# EAGLE board Proiect TSC v74 (EAGLE 9.7.0)
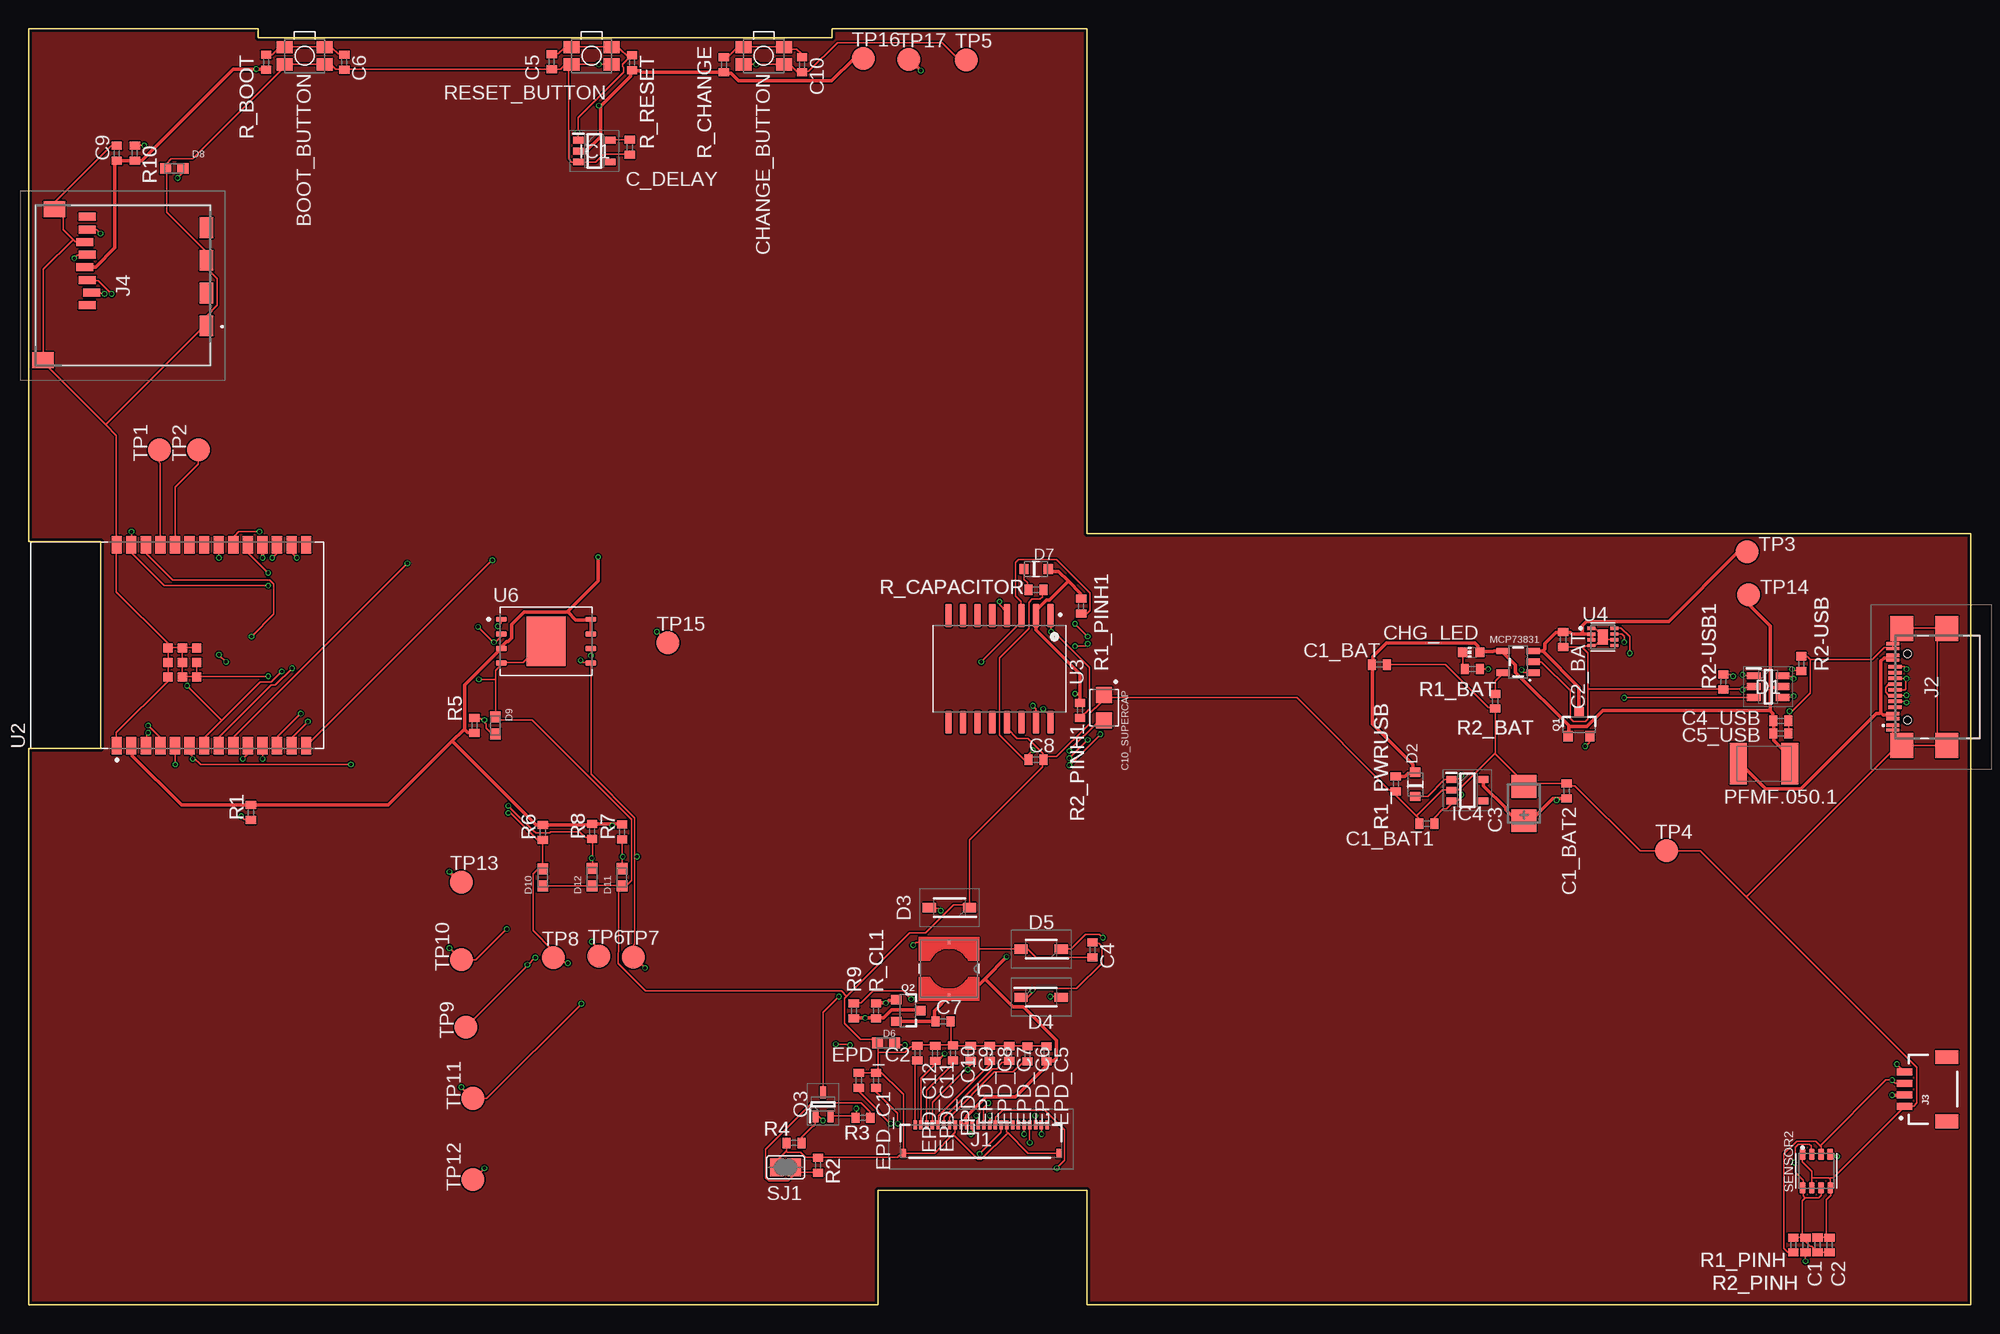
[diagram p0: board, top side]
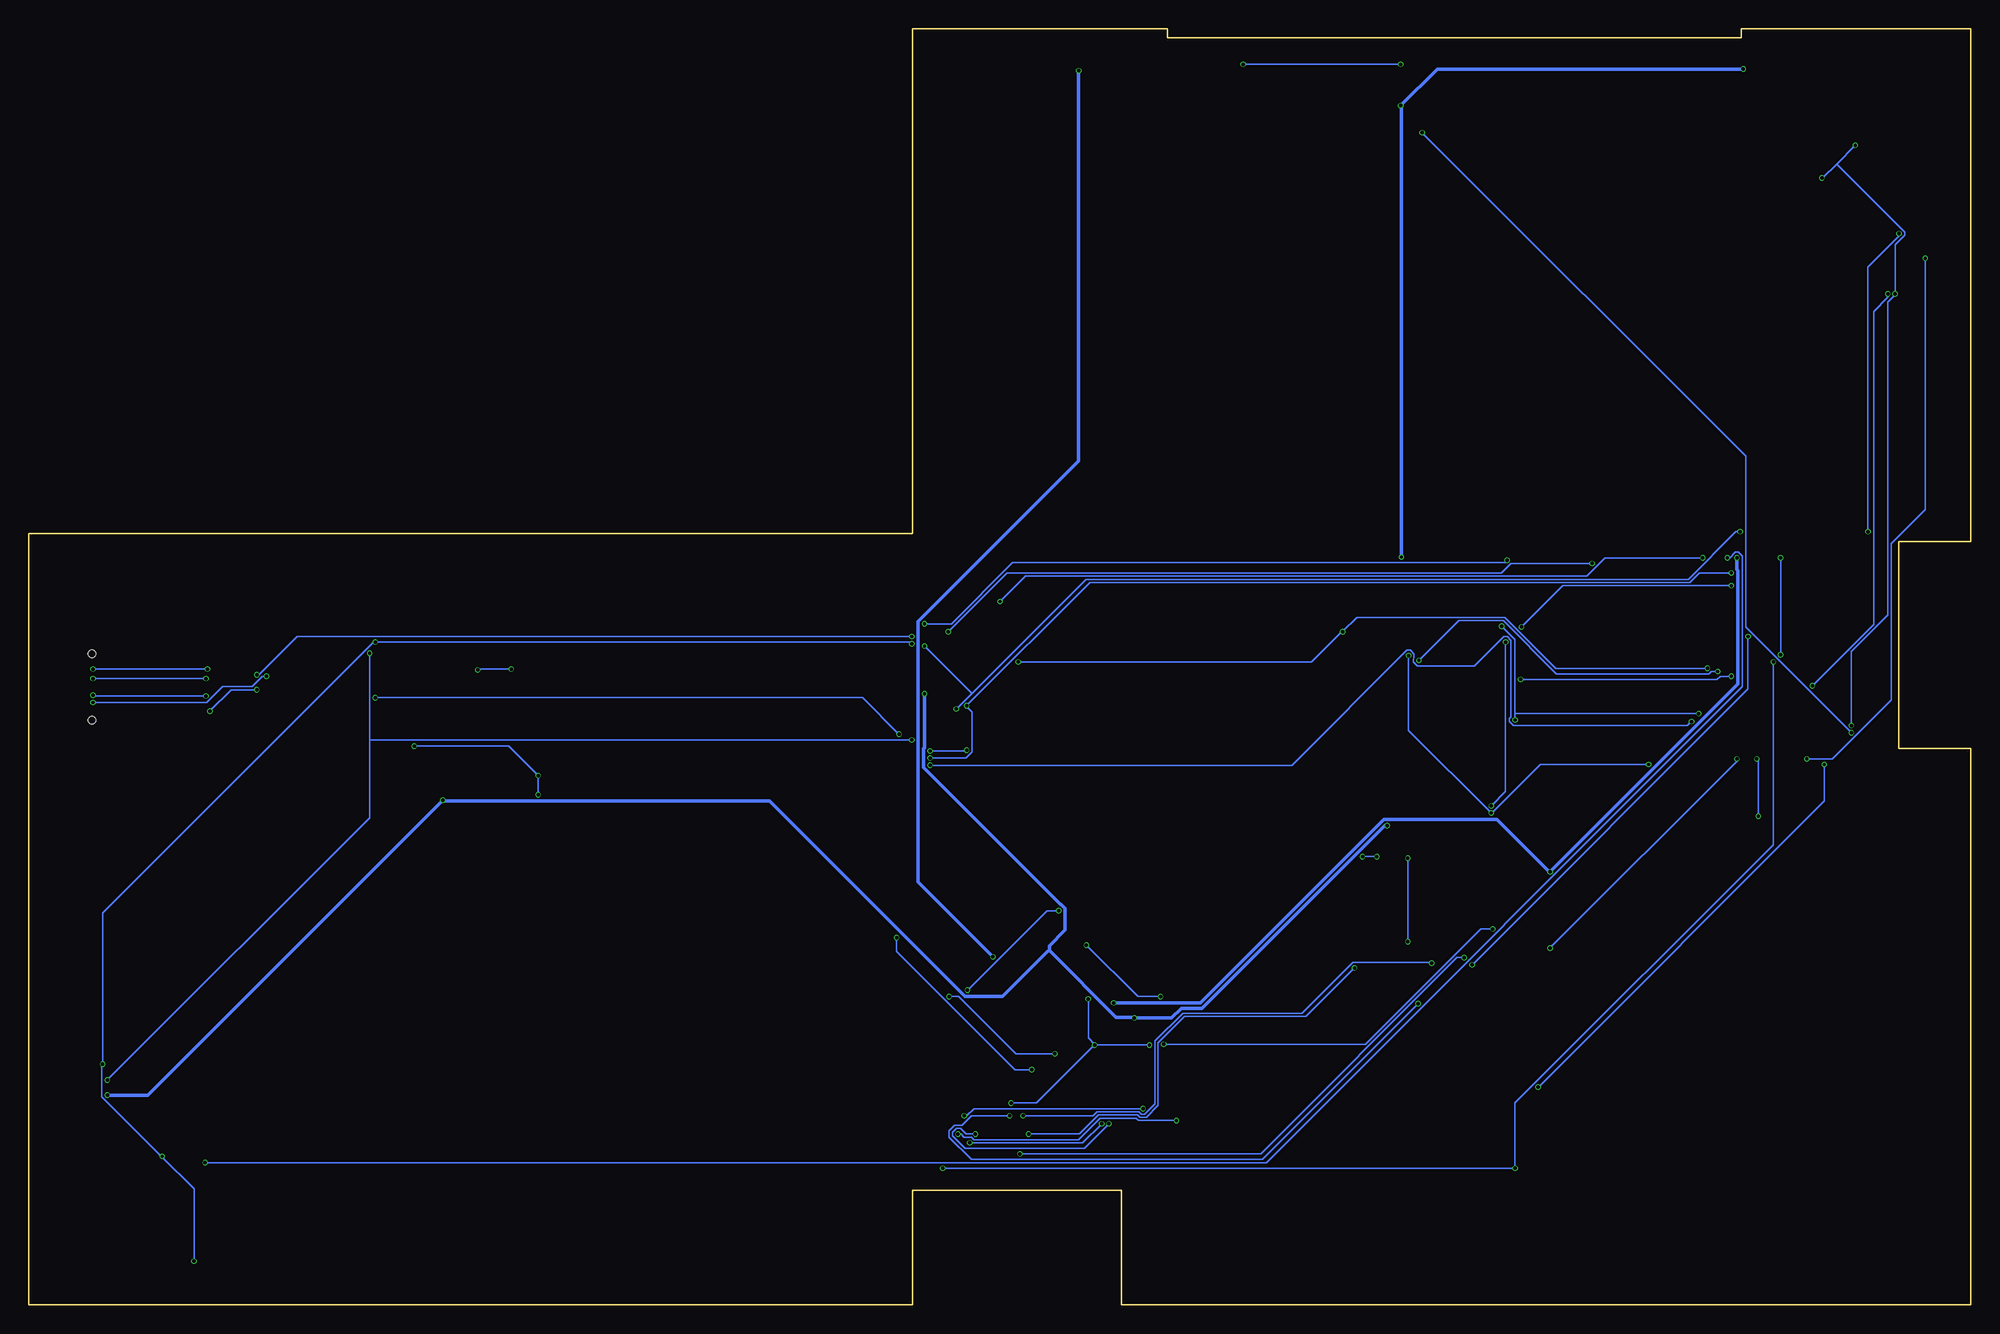
[diagram p1: board, bottom side, seen from below]

Size 169.2 x 111.2 mm. Coordinates in mm from the lower left corner, seen from the top.
Outline: 70,111.2 92.2,111.2 92.2,67.2 169.2,67.2 169.2,0 169.19,0 92.2,0 92.2,10 74,10 74,0 0,0 0,48.49 6.25,48.49 6.25,66.49 0,66.49 0,111.2 20,111.2 20,110.4 70,110.4 70,111.2
Copper layers (1*16): Top 0.035mm / dielectric 1.6mm / Bottom 0.035mm
Design rules "jlcpcb-2layers.dru": minimum track width 5mil, minimum drill 0.3mm, track to track 5mil, track to pad 5mil, pad to pad 5mil, via to via 5mil, smd to smd 5mil, copper to edge 0.2mm, drill to drill 6mil, minimum pad ring 10mil, minimum via ring 3mil, stop-mask expansion 4mil, vias tented up to drill 0mil, thermal gap 10mil
Net classes: 0 default: width 0.15 mm; 1 power: width 0.3 mm

## Footprints (pad centres in the part's own frame; a part is rotated, then mirrored left to right if it is on the bottom)
MYBUTTON = smd 1.4 x 1.05: 1 1.75,0.75; 2 -1.75,0.75; 3 -1.75,-0.75; 4 1.75,-0.75
ESP32_WROVER_EAGLE-LTSPICE_C0402 = smd 0.7 x 0.9: 1 -0.65,0; 2 0.65,0
RCL_CT3528 = smd 2 x 2.2: + -1.5,0; - 1.5,0
EAGLE-LTSPICE_C0402 = smd 0.7 x 0.9: 1 -0.65,0; 2 0.65,0
CAPCP3225X100N = smd 1.4 x 1.4: 1 -1.1,0; 2 1.1,0
ADAFRUIT_CHIP-LED0603 = smd 0.8 x 0.8: A 0,-0.75; C 0,0.75
SOT95P280X145-6N = smd 1.2 x 0.6: 1 -1.25,0.95; 2 -1.25,0; 3 -1.25,-0.95; 4 1.25,-0.95; 5 1.25,0; 6 1.25,0.95
ESP32_WROVER_AVX---SD0805S020S1R0_AVX_SD0805S020S1R0_0 = smd 0.8 x 0.9: 1 -1.05,0; 2 1.05,0
SOD3716X135N = smd 1.15 x 0.8: 1 -1.75,0; 2 1.75,0
DIOC1608X36N = smd 0.97 x 0.94: 1 -0.75,0; 2 0.75,0
SOT95P280X125-5N = smd 0.9 x 0.6: 1 -1.4,0.95; 2 -1.4,0; 3 -1.4,-0.95; 4 1.4,-0.95; 5 1.4,0.95
SOT95P280X120-5N = smd 0.9 x 0.6: 1 -1.4,0.95; 2 -1.4,0; 3 -1.4,-0.95; 4 1.4,-0.95; 5 1.4,0.95
FH34SRJ24S05SH99 = smd 0.3 x 0.8: 1 5.75,1.45; 2 5.25,1.45; 3 4.75,1.45; 4 4.25,1.45; 5 3.75,1.45; 6 3.25,1.45; 7 2.75,1.45; 8 2.25,1.45; 9 1.75,1.45; 10 1.25,1.45; 11 0.75,1.45; 12 0.25,1.45; 13 -0.25,1.45; 14 -0.75,1.45; 15 -1.25,1.45; 16 -1.75,1.45; 17 -2.25,1.45; 18 -2.75,1.45; 19 -3.25,1.45; 20 -3.75,1.45; 21 -4.25,1.45; 22 -4.75,1.45; 23 -5.25,1.45; 24 -5.75,1.45 | smd 0.4 x 0.8: MP1 6.75,-1.05; MP2 -6.75,-1.05
SAMACSYS_PARTS_USB4110GFA = smd 0.3 x 1.15: A1 -3.75,3.878; A4 -2.75,3.878; A5 -1.25,3.678; A6 -0.25,3.678; A7 0.25,3.678; A8 1.25,3.678; A9 2.75,3.878; A12 3.75,3.878; B1 3.35,3.878; B4 2.35,3.878; B5 1.75,3.678; B6 0.75,3.678; B7 -0.75,3.678; B8 -1.75,3.678; B9 -2.35,3.878; B12 -3.35,3.878 | smd 2.18 x 2: MP1 -5.11,-0.827; MP2 5.11,-0.827; MP3 -5.11,3.103; MP4 5.11,3.103 | hole 0.65: -2.89,2.603; 2.89,2.603
JST04_1MM_RA = smd 0.6 x 1.35: 1 -1.5,0; 2 -0.5,0; 3 0.5,0; 4 1.5,0 | smd 1.2 x 2: NC1 2.8,-3.675; NC2 -2.8,-3.675
112ATAARR03ATTEND = smd 1.8 x 1.2: G1 10.6,10.4; G2 4.9,10.4; S1 7.75,10.4; S2 2.05,10.4 | smd 1.4 x 1.9: G3 13.6,-3.85; G4 0.45,-2.85 | smd 0.7 x 1.5: P1 8.8,0; P2 7.7,0.4; P3 6.6,0; P4 5.5,-0.2; P5 4.4,0; P6 3.3,-0.2; P7 2.2,0; P8 1.1,0
IND_4828-WE-TPC_WRE = smd 0.3 x 0.3: 1 -2.286,0; 2 2.286,0
ESP32_WROVER_SPARKFUN-IC-POWER_SOT23-5 = smd 0.55 x 1.2: 1 -0.95,-1.3; 2 0,-1.3; 3 0.95,-1.3; 4 0.95,1.3; 5 -0.95,1.3
ESP32C6_VARISTOR_CT/CN1812 = smd 1.5 x 3.6: 1 -2.25,0; 2 2.25,0
ESP32_WROVER_SPARKFUN-DISCRETESEMI_SOT23-3 = smd 0.8 x 0.9: 1 -0.95,-1; 2 0.95,-1; 3 0,1.1
SOT65P210X110-3N = smd 1.05 x 0.5: 1 -1.05,0.65; 2 -1.05,-0.65; 3 1.05,0
ESP32_WROVER_EAGLE-LTSPICE_R0402 = smd 0.7 x 0.9: 1 -0.65,0; 2 0.65,0
ESP32_WROVER_BME680_PSON80P300X300X100-8N = smd 1.016 x 0.5: 1 1.458,1.2; 2 1.458,0.4; 3 1.458,-0.4; 4 1.458,-1.2; 5 -1.458,-1.22; 6 -1.458,-0.4; 7 -1.458,0.4; 8 -1.458,1.2
SJ = smd 1.168 x 1.6: 1 -0.762,0; 2 0.762,0
TP20R = smd 2 x 2: TP 0,0
XCVR_ESP32-C6-WROOM-1-N8 = smd 1.5 x 0.9: 1 -8.75,5.26; 2 -8.75,3.99; 3 -8.75,2.72; 4 -8.75,1.45; 5 -8.75,0.18; 6 -8.75,-1.09; 7 -8.75,-2.36; 8 -8.75,-3.63; 9 -8.75,-4.9; 10 -8.75,-6.17; 11 -8.75,-7.44; 12 -8.75,-8.71; 13 -8.75,-9.98; 14 -8.75,-11.25; 15 8.75,-11.25; 16 8.75,-9.98; 17 8.75,-8.71; 18 8.75,-7.44; 19 8.75,-6.17; 20 8.75,-4.9; 21 8.75,-3.63; 22 8.75,-2.36; 23 8.75,-1.09; 24 8.75,0.18; 25 8.75,1.45; 26 8.75,2.72; 27 8.75,3.99; 28 8.75,5.26 | smd 0.8 x 0.8: 29_1 -2.755,0.79; 29_2 -1.505,0.79; 29_3 -0.255,0.79; 29_4 -2.755,-0.46; 29_5 -1.505,-0.46; 29_6 -0.255,-0.46; 29_7 -2.755,-1.71; 29_8 -1.505,-1.71; 29_9 -0.255,-1.71
SOIC127P1032X265-16N = smd 2.05 x 0.59: 1 -4.655,4.445; 2 -4.655,3.175; 3 -4.655,1.905; 4 -4.655,0.635; 5 -4.655,-0.635; 6 -4.655,-1.905; 7 -4.655,-3.175; 8 -4.655,-4.445; 9 4.655,-4.445; 10 4.655,-3.175; 11 4.655,-1.905; 12 4.655,-0.635; 13 4.655,0.635; 14 4.655,1.905; 15 4.655,3.175; 16 4.655,4.445
SON50P200X200X80-9N = smd 0.76 x 0.27: 1 -0.985,0.75; 4 -0.985,-0.75; 5 0.985,-0.75; 6 0.985,-0.25; 7 0.985,0.25; 8 0.985,0.75 | smd 0.76 x 0.3: 2 -0.985,0.25; 3 -0.985,-0.25 | smd 0.9 x 1.3: 9 0,0
SON127P600X800X80-9N = smd 0.94 x 0.44: 1 -3.895,1.905; 2 -3.895,0.635; 3 -3.895,-0.635; 4 -3.895,-1.905; 5 3.895,-1.905; 6 3.895,-0.635; 7 3.895,0.635; 8 3.895,1.905 | smd 3.4 x 4.3: 9 0,0

## Placement (x,y rotation side)
BOOT_BUTTON  BUTTON_CUSYOMV1  [MYBUTTON]  24.04,108.83 180 top
C1  100nF  [ESP32_WROVER_EAGLE-LTSPICE_C0402]  155.84,5.22 90 top
C1_BAT  4.7uF  [ESP32_WROVER_EAGLE-LTSPICE_C0402]  117.68,55.79 0 top
C1_BAT1  4.7uF  [ESP32_WROVER_EAGLE-LTSPICE_C0402]  121.8,41.93 180 top
C1_BAT2  4.7uF  [ESP32_WROVER_EAGLE-LTSPICE_C0402]  133.99,44.77 90 top
C2  100nF  [ESP32_WROVER_EAGLE-LTSPICE_C0402]  156.89,5.22 90 top
C2_BAT  4.7uF  [ESP32_WROVER_EAGLE-LTSPICE_C0402]  133.68,57.98 270 top
C3  100uF TANT  [RCL_CT3528]  130.26,43.69 90 top
C4  4.7uF/25V  [ESP32_WROVER_EAGLE-LTSPICE_C0402]  92.67,30.92 270 top
C4_USB  100nF  [ESP32_WROVER_EAGLE-LTSPICE_C0402]  152.64,50.89 0 top
C5  1uF  [EAGLE-LTSPICE_C0402]  45.57,108.32 270 top
C5_USB  100nF  [ESP32_WROVER_EAGLE-LTSPICE_C0402]  152.65,49.79 0 top
C6  100nF  [EAGLE-LTSPICE_C0402]  27.49,108.29 270 top
C7  10uF  [EAGLE-LTSPICE_C0402]  79.67,24.7 0 top
C8  100nF  [EAGLE-LTSPICE_C0402]  87.77,47.5 0 top
C9  100nF  [ESP32_WROVER_EAGLE-LTSPICE_C0402]  7.67,100.34 90 top
C10  100nF  [EAGLE-LTSPICE_C0402]  67.37,108.05 270 top
C10_SUPERCAP  CPH3225A  [CAPCP3225X100N]  93.69,52.04 270 top
C_DELAY  100nF  [EAGLE-LTSPICE_C0402]  52.37,100.86 270 top
CHANGE_BUTTON  BUTTON_CUSYOMV1  [MYBUTTON]  64.04,108.83 180 top
CHG_LED  [ADAFRUIT_CHIP-LED0603]  125.68,56.87 90 top
D1  USBLC6-2SC6Y  [SOT95P280X145-6N]  151.54,53.87 0 top
D2  ESP32_WROVER_AVX---SD0805S020S1R0_AVX_SD0805S020S1R0_0_0AVX_SD0805S020S1R0_0_0  [ESP32_WROVER_AVX---SD0805S020S1R0_AVX_SD0805S020S1R0_0]  120.8,45.36 90 top
D3  MBR0530  [SOD3716X135N]  80.21,34.62 180 top
D4  MBR0530  [SOD3716X135N]  88.21,26.81 0 top
D5  MBR0530  [SOD3716X135N]  88.21,31 180 top
D6  PGB1010603MR  [DIOC1608X36N]  74.69,22.83 0 top
D7  ESP32_WROVER_AVX---SD0805S020S1R0_AVX_SD0805S020S1R0_0_0AVX_SD0805S020S1R0_0_0  [ESP32_WROVER_AVX---SD0805S020S1R0_AVX_SD0805S020S1R0_0]  87.77,64.12 0 top
D8  PGB1010603MR  [DIOC1608X36N]  12.69,99.02 0 top
D9  PGB1010603MR  [DIOC1608X36N]  40.65,50.49 270 top
D10  PGB1010603MR  [DIOC1608X36N]  44.79,37.25 90 top
D11  PGB1010603MR  [DIOC1608X36N]  51.69,37.26 90 top
D12  PGB1010603MR  [DIOC1608X36N]  49.09,37.27 90 top
EPD_C1  1uF/50V  [ESP32_WROVER_EAGLE-LTSPICE_C0402]  73.82,19.56 270 top
EPD_C2  1uF/50V  [ESP32_WROVER_EAGLE-LTSPICE_C0402]  72.32,19.57 270 top
EPD_C5  1uF/50V  [ESP32_WROVER_EAGLE-LTSPICE_C0402]  88.67,21.88 270 top
EPD_C6  1uF/50V  [ESP32_WROVER_EAGLE-LTSPICE_C0402]  87.02,21.89 270 top
EPD_C7  1uF/50V  [ESP32_WROVER_EAGLE-LTSPICE_C0402]  85.42,21.9 270 top
EPD_C8  1uF/50V  [ESP32_WROVER_EAGLE-LTSPICE_C0402]  83.73,21.91 270 top
EPD_C9  1uF/50V  [ESP32_WROVER_EAGLE-LTSPICE_C0402]  82.08,21.92 270 top
EPD_C10  1uF/50V  [ESP32_WROVER_EAGLE-LTSPICE_C0402]  80.52,21.95 270 top
EPD_C11  1uF/50V  [ESP32_WROVER_EAGLE-LTSPICE_C0402]  78.97,21.93 270 top
EPD_C12  1uF/50V  [ESP32_WROVER_EAGLE-LTSPICE_C0402]  77.42,21.94 270 top
IC1  BD5229G-TR  [SOT95P280X125-5N]  49.28,100.54 0 top
IC4  XC6220A331MR-G  [SOT95P280X120-5N]  125.34,44.85 0 top
J1  FH34SRJ-24S-0.5SH_99_  [FH34SRJ24S05SH99]  82.97,14.25 0 top
J2  SAMACSYS_PARTS_USB4110-GF-A  [SAMACSYS_PARTS_USB4110GFA]  166.28,53.84 90 top
J3  QWIIC_RIGHT_ANGLE  [JST04_1MM_RA]  163.43,18.79 90 top
J4  112A-TAAR-R03_ATTEND  [112ATAARR03ATTEND]  5.09,95.91 270 top
L1  68uH  [IND_4828-WE-TPC_WRE]  80.18,29.29 270 top
MCP73831  ESP32_WROVER_SPARKFUN-IC-POWER_MCP73831  [ESP32_WROVER_SPARKFUN-IC-POWER_SOT23-5]  129.76,56.03 90 top
PFMF.050.1  ESP32C6_VARISTORCN1812  [ESP32C6_VARISTOR_CT/CN1812]  151.19,47.17 0 top
Q1  20V/4.2A/52mΩ/1.4W  [ESP32_WROVER_SPARKFUN-DISCRETESEMI_SOT23-3]  135.07,50.55 0 top
Q2  20V/4.2A/52mΩ/1.4W  [ESP32_WROVER_SPARKFUN-DISCRETESEMI_SOT23-3]  76.59,25.65 270 top
Q3  SI1308EDL-T1-GE3  [SOT65P210X110-3N]  69.21,17.49 90 top
R1  10K  [ESP32_WROVER_EAGLE-LTSPICE_R0402]  19.36,42.9 90 top
R1_BAT  200  [ESP32_WROVER_EAGLE-LTSPICE_R0402]  125.76,55.41 0 top
R1_PINH  10K  [ESP32_WROVER_EAGLE-LTSPICE_R0402]  153.74,5.22 90 top
R1_PINH1  10K  [ESP32_WROVER_EAGLE-LTSPICE_R0402]  91.69,60.88 90 top
R1_PWRUSB  100K  [ESP32_WROVER_EAGLE-LTSPICE_R0402]  119.1,45.4 90 top
R2  2.2  [ESP32_WROVER_EAGLE-LTSPICE_R0402]  68.77,12.18 270 top
R2-USB  5k1  [ESP32_WROVER_EAGLE-LTSPICE_R0402]  154.43,55.87 90 top
R2-USB1  5k1  [ESP32_WROVER_EAGLE-LTSPICE_R0402]  147.63,54.29 90 top
R2_BAT  2K  [ESP32_WROVER_EAGLE-LTSPICE_R0402]  127.76,52.6 90 top
R2_PINH  10K  [ESP32_WROVER_EAGLE-LTSPICE_R0402]  154.79,5.22 90 top
R2_PINH1  10K  [ESP32_WROVER_EAGLE-LTSPICE_R0402]  91.59,51.79 90 top
R3  0.47  [ESP32_WROVER_EAGLE-LTSPICE_R0402]  72.67,16.3 180 top
R4  10k  [ESP32_WROVER_EAGLE-LTSPICE_R0402]  66.67,14.11 0 top
R5  10K  [ESP32_WROVER_EAGLE-LTSPICE_R0402]  38.84,50.49 270 top
R6  10K  [ESP32_WROVER_EAGLE-LTSPICE_R0402]  44.79,41.18 90 top
R7  10K  [ESP32_WROVER_EAGLE-LTSPICE_R0402]  51.69,41.2 90 top
R8  10K  [ESP32_WROVER_EAGLE-LTSPICE_R0402]  49.09,41.24 90 top
R9  10K  [ESP32_WROVER_EAGLE-LTSPICE_R0402]  71.89,25.62 270 top
R10  10K  [ESP32_WROVER_EAGLE-LTSPICE_R0402]  9.25,100.36 270 top
R_BOOT  10K  [ESP32_WROVER_EAGLE-LTSPICE_R0402]  20.69,108.28 270 top
R_CAPACITOR  15  [ESP32_WROVER_EAGLE-LTSPICE_R0402]  87.77,62.31 0 top
R_CHANGE  10K  [ESP32_WROVER_EAGLE-LTSPICE_R0402]  60.57,108.06 270 top
R_CL1  10K  [ESP32_WROVER_EAGLE-LTSPICE_R0402]  73.82,25.63 270 top
R_RESET  10K  [ESP32_WROVER_EAGLE-LTSPICE_R0402]  52.57,108.25 270 top
RESET_BUTTON  BUTTON_CUSYOMV1  [MYBUTTON]  49.04,108.83 180 top
SENSOR2  ESP32_WROVER_BME680_BME680  [ESP32_WROVER_BME680_PSON80P300X300X100-8N]  155.74,11.67 90 top
SJ1  [SJ]  65.94,11.99 0 top
TP1  TPTP20R  [TP20R]  11.4,74.49 90 top
TP2  TPTP20R  [TP20R]  14.78,74.49 90 top
TP3  TPTP20R  [TP20R]  149.69,65.64 0 top
TP4  TPTP20R  [TP20R]  142.69,39.56 0 top
TP5  TPTP20R  [TP20R]  81.69,108.48 0 top
TP6  TPTP20R  [TP20R]  49.69,30.4 0 top
TP7  TPTP20R  [TP20R]  52.69,30.32 0 top
TP8  TPTP20R  [TP20R]  45.69,30.24 0 top
TP9  TPTP20R  [TP20R]  38.09,24.21 90 top
TP10  TPTP20R  [TP20R]  37.69,30.08 90 top
TP11  TPTP20R  [TP20R]  38.69,18 90 top
TP12  TPTP20R  [TP20R]  38.69,10.92 90 top
TP13  TPTP20R  [TP20R]  37.69,36.84 0 top
TP14  TPTP20R  [TP20R]  149.82,61.89 0 top
TP15  TPTP20R  [TP20R]  55.69,57.68 0 top
TP16  TPTP20R  [TP20R]  72.69,108.6 0 top
TP17  TPTP20R  [TP20R]  76.69,108.52 0 top
U2  ESP32-C6-WROOM-1-N8  [XCVR_ESP32-C6-WROOM-1-N8]  12.93,57.48 90 top
U3  DS3231SN#  [SOIC127P1032X265-16N]  84.58,55.43 270 top
U4  MAX17048G+T10  [SON50P200X200X80-9N]  137.14,58.2 0 top
U6  W25Q512JVEIQ  [SON127P600X800X80-9N]  45.07,57.83 0 top

## Library data of the parts
BOOT_BUTTON CHANGE_BUTTON CHG_LED PFMF.050.1 RESET_BUTTON SJ1 TP1-TP17 = DeskAssistant v19 v1
C1 C1_BAT C1_BAT1 C1_BAT2 C2 C2_BAT C4 C4_USB C5 C5_USB C6-C10 C_DELAY EPD_C1 EPD_C2 EPD_C5-EPD_C12 = DeskAssistant v19 v1; SPICEMODEL: NONE; SPICEPREFIX: C
C3 = DeskAssistant v19 v1; SPICEPREFIX: C
C10_SUPERCAP = DeskAssistant v19 v1; AVAILABILITY: Not in stock; CHECK_PRICES: https://www.snapeda.com/parts/CPH3225A/Seiko+Instruments/view-part/?ref=eda; DESCRIPTION: 11 mF (EDLC) Supercapacitor 3.3 V 1210 (3225 Metric) - -; MF: Seiko Instruments; MP: CPH3225A; PACKAGE: 1210 Seiko; PRICE: None; PURCHASE-URL: https://www.snapeda.com/api/url_track_click_mouser/?unipart_id=562593&manufacturer=Seiko Instruments&part_name=CPH3225A&search_term=None; SNAPEDA_LINK: https://www.snapeda.com/parts/CPH3225A/Seiko+Instruments/view-part/?ref=snap
D1 = DeskAssistant v19 v1; AVAILABILITY: In Stock; CHECK_PRICES: https://www.snapeda.com/parts/USBLC6-2SC6Y/STMicroelectronics/view-part/?ref=eda; DESCRIPTION: 17V Clamp 5A (8/20µs) Ipp Tvs Diode Surface Mount SOT-23-6; MF: STMicroelectronics; MP: USBLC6-2SC6Y; PACKAGE: SOT-23-6 STMicroelectronics; PRICE: None; SNAPEDA_LINK: https://www.snapeda.com/parts/USBLC6-2SC6Y/STMicroelectronics/view-part/?ref=snap
D2 D7 = DeskAssistant v19 v1; CENTROID_NOT_SPECIFIED: No; DATASHEET: http://datasheets.avx.com/schottky.pdf; DIGIKEY_DESCRIPTION: DIODE SCHOTTKY 20V 1A 0805; DIGIKEY_PART_NUMBER: 478-7800-1-ND; LEAD_FREE: yes; MF: AVX; MOUSER_PART_NUMBER: 581-SD0805S020S1R0; PACKAGE: 0805 (2012 metric); PREFIX: D; ROHS: yes; TEMPERATURE_RANGE_HIGH: +125°C; TEMPERATURE_RANGE_LOW: -55°C
D3-D5 = DeskAssistant v19 v1; AVAILABILITY: In Stock; CHECK_PRICES: https://www.snapeda.com/parts/MBR0530/Onsemi/view-part/?ref=eda; DESCRIPTION: Diode Schottky 30 V 500mA Surface Mount SOD-123; MF: ON Semiconductor; MP: MBR0530; PACKAGE: SOD-123-2 ON Semiconductor; PRICE: None; PURCHASE-URL: https://www.snapeda.com/api/url_track_click_mouser/?unipart_id=179458&manufacturer=ON Semiconductor&part_name=MBR0530&search_term=None; SNAPEDA_LINK: https://www.snapeda.com/parts/MBR0530/Onsemi/view-part/?ref=snap
D6 D8-D12 = DeskAssistant v19 v1; AVAILABILITY: In Stock; CHECK_PRICES: https://www.snapeda.com/parts/PGB1010603MR/Littelfuse/view-part/?ref=eda; DESCRIPTION: 150V (Typ) Clamp - Ipp Tvs Diode Surface Mount 0603 (1608 Metric); MF: Littelfuse Inc.; MP: PGB1010603MR; PACKAGE: 0603 Littelfuse Inc.; PRICE: None; PURCHASE-URL: https://www.snapeda.com/api/url_track_click_mouser/?unipart_id=5659453&manufacturer=Littelfuse Inc.&part_name=PGB1010603MR&search_term=None; SNAPEDA_LINK: https://www.snapeda.com/parts/PGB1010603MR/Littelfuse/view-part/?ref=snap
IC1 = DeskAssistant v19 v1; DESCRIPTION: Voltage Detector with Adjustable Delay Time: CMOS processes are utilized to develop high precision, low current consumption CMOS reset ICs that allow arbitrary setting of the delay time. The extensive lineup includes both Nch Open Drain and CMOS output types in a wide range of detection voltages (from 2.3V to 6.0V, in 0.1V steps), enabling selection of the ideal solution based on customer requirements. In addition, the entire series is of course both lead-free and RoHS-compliant.; HEIGHT: 1.25mm; MANUFACTURER_NAME: ROHM Semiconductor; MANUFACTURER_PART_NUMBER: BD5229G-TR; MOUSER_PART_NUMBER: 755-BD5229G-TR; MOUSER_PRICE-STOCK: https://www.mouser.co.uk/ProductDetail/ROHM-Semiconductor/BD5229G-TR?qs=4kLU8WoGk0vvnhrrYwdszw%3D%3D
IC4 = DeskAssistant v19 v1; DESCRIPTION: LDO Voltage Regulators; HEIGHT: 1.2mm; MANUFACTURER_NAME: Torex; MANUFACTURER_PART_NUMBER: XC6220A331MR-G; MOUSER_PART_NUMBER: 865-XC6220A331MR-G; MOUSER_PRICE-STOCK: https://www.mouser.co.uk/ProductDetail/Torex-Semiconductor/XC6220A331MR-G?qs=AsjdqWjXhJ8ZSWznL1J0gg%3D%3D
J1 = DeskAssistant v19 v1; DESCRIPTION: 24 Position FFC, FPC Connector Contacts, Top and Bottom 0.020" (0.50mm) Surface Mount, Right Angle; HEIGHT: 1.1mm; MANUFACTURER_NAME: Hirose; MANUFACTURER_PART_NUMBER: FH34SRJ-24S-0.5SH(99); MOUSER_PART_NUMBER: 798-FH34SRJ24S05SH99; MOUSER_PRICE-STOCK: https://www.mouser.co.uk/ProductDetail/Hirose-Connector/FH34SRJ-24S-0.5SH99?qs=vcbW%252B4%252BSTIpKBl5ap9J8Fw%3D%3D
J2 = DeskAssistant v19 v1; DESCRIPTION: CONN USB 2.0 TYPE-C R/A SMT; HEIGHT: 3.26mm; MANUFACTURER_NAME: GCT (GLOBAL CONNECTOR TECHNOLOGY); MANUFACTURER_PART_NUMBER: USB4110-GF-A; MOUSER_PART_NUMBER: 640-USB4110-GF-A; MOUSER_PRICE-STOCK: https://www.mouser.co.uk/ProductDetail/GCT/USB4110-GF-A?qs=KUoIvG%2F9IlYiZvIXQjyJeA%3D%3D
J3 = DeskAssistant v19 v1; PROD_ID: CONN-13694
J4 = DeskAssistant v19 v1; DESCRIPTION: Micro SD Card Socket, Push-Push Type, Top Mount, SMT, H=1.83mm, 10u; HEIGHT: 1.9mm; MANUFACTURER_NAME: ATTEND; MANUFACTURER_PART_NUMBER: 112A-TAAR-R03 ATTEND
L1 = DeskAssistant v19 v1; COPYRIGHT: Copyright (C) 2024 Ultra Librarian. All rights reserved.; MANUFACTURER_PART_NUMBER: 744043680; MFR_NAME: Wurth Electronics
MCP73831 = DeskAssistant v19 v1; PROD_ID: IC-09995
Q1 Q2 = DeskAssistant v19 v1; PROD_ID: TRAN-14388
Q3 = DeskAssistant v19 v1; AVAILABILITY: In Stock; CHECK_PRICES: https://www.snapeda.com/parts/SI1308EDL-T1-GE3/Vishay+Siliconix/view-part/?ref=eda; DESCRIPTION: Si1308EDL-T1-GE3 N-channel MOSFET Transistor, 1.5 A, 30 V, 3-Pin SC-70 | Siliconix / Vishay SI1308EDL-T1-GE3; MF: Vishay Siliconix; MP: SI1308EDL-T1-GE3; PACKAGE: SOT-323 Vishay Semiconductor; PRICE: None; PURCHASE-URL: https://www.snapeda.com/api/url_track_click_mouser/?unipart_id=274603&manufacturer=Vishay Siliconix&part_name=SI1308EDL-T1-GE3&search_term=None; SNAPEDA_LINK: https://www.snapeda.com/parts/SI1308EDL-T1-GE3/Vishay+Siliconix/view-part/?ref=snap
R1 R1_BAT R1_PINH R1_PINH1 R1_PWRUSB R2 R2-USB R2-USB1 R2_BAT R2_PINH R2_PINH1 R3-R10 R_BOOT R_CAPACITOR R_CHANGE R_CL1 R_RESET = DeskAssistant v19 v1; SPICEMODEL: NONE; SPICEPREFIX: R
SENSOR2 = DeskAssistant v19 v1; AVAILABILITY: Unavailable; DESCRIPTION: Integrated Environmental Unit; MF: Bosch Sensortec; MP: BME680; PACKAGE: LGA-8 Bosch Tools; PRICE: None
U2 = DeskAssistant v19 v1; AVAILABILITY: In Stock; CHECK_PRICES: https://www.snapeda.com/parts/ESP32-C6-WROOM-1-N8/Espressif+Systems/view-part/?ref=eda; DESCRIPTION: Multiprotocol Modules ESP32-C6 module, Wi-Fi 6 in 2.4 GHz band, Bluetooth 5, Zigbee 3.0 and Thread. ESP34-WROOM Compatible - ENGINEERING SAMPLE; MF: Espressif Systems; MP: ESP32-C6-WROOM-1-N8; PACKAGE: None; PRICE: None; SNAPEDA_LINK: https://www.snapeda.com/parts/ESP32-C6-WROOM-1-N8/Espressif+Systems/view-part/?ref=snap
U3 = DeskAssistant v19 v1; AVAILABILITY: In Stock; CHECK_PRICES: https://www.snapeda.com/parts/DS3231SN%23/Analog+Devices/view-part/?ref=eda; DESCRIPTION: Extremely Accurate I²C-Integrated RTC/TCXO/Crystal; MF: Analog Devices; MP: DS3231SN#; PACKAGE: SOIC-16 Maxim; PRICE: None; PURCHASE-URL: https://www.snapeda.com/api/url_track_click_mouser/?unipart_id=99048&manufacturer=Analog Devices&part_name=DS3231SN#&search_term=None; SNAPEDA_LINK: https://www.snapeda.com/parts/DS3231SN%23/Analog+Devices/view-part/?ref=snap
U4 = DeskAssistant v19 v1; AVAILABILITY: In Stock; CHECK_PRICES: https://www.snapeda.com/parts/MAX17048G+T10/Analog+Devices/view-part/?ref=eda; DESCRIPTION: 3µA 1-Cell/2-Cell Fuel Gauge with ModelGauge; MF: Analog Devices; MP: MAX17048G+T10; PACKAGE: TDFN-8 Maxim; PRICE: None; PURCHASE-URL: https://www.snapeda.com/api/url_track_click_mouser/?unipart_id=329239&manufacturer=Analog Devices&part_name=MAX17048G+T10&search_term=None; SNAPEDA_LINK: https://www.snapeda.com/parts/MAX17048G+T10/Analog+Devices/view-part/?ref=snap
U6 = DeskAssistant v19 v1; AVAILABILITY: In Stock; CHECK_PRICES: https://www.snapeda.com/parts/W25Q512JVEIQ/Winbond+Electronics/view-part/?ref=eda; DESCRIPTION: FLASH - NOR Memory IC 512Mb (64M x 8) SPI - Quad I/O 133 MHz 8-WSON (8x6); MF: Winbond Electronics; MP: W25Q512JVEIQ; PACKAGE: Package; PRICE: None; SNAPEDA_LINK: https://www.snapeda.com/parts/W25Q512JVEIQ/Winbond+Electronics/view-part/?ref=snap

## Nets
3V3 [power]: C1_BAT2.1 C3.+ C9.1 D7.2 IC1.2 IC4.5 J3.2 J4.P4 Q2.3 R1.2 R1_PINH1.2 R2_PINH1.2 R5.2 R6.2 R7.2 R8.2 R9.2 R10.2 R_BOOT.2 R_CHANGE.2 R_CL1.2 R_RESET.2 TP16.TP U2.2 U3.2 U6.3 U6.7 U6.8
32KHZ: R2_PINH1.1 U2.9 U3.1
BOOT: BOOT_BUTTON.3 BOOT_BUTTON.4 C6.1 R_BOOT.1
CHANGE: C10.1 CHANGE_BUTTON.3 CHANGE_BUTTON.4 R_CHANGE.1
DN: D1.4 J2.A7 J2.B7
DP: D1.6 J2.A6 J2.B6
EPD_3V3 [power]: C7.1 EPD_C5.2 J1.15 J1.16 L1.2 Q2.2 TP17.TP
EPD_3V3_C [power]: Q2.1 R_CL1.1 TP13.TP U2.18
EPD_BUSY: J1.9 TP9.TP U2.26
EPD_CS: D6.2 J1.12 R9.1 TP10.TP U2.11
EPD_DC: J1.11 TP11.TP U2.5
EPD_RST: J1.10 TP12.TP U2.21
FLASH_CS: D9.2 R5.1 U2.12 U6.1
GDR: J1.2 Q3.1 R4.2
GND: BOOT_BUTTON.1 BOOT_BUTTON.2 C1.2 C1_BAT1.2 C1_BAT2.2 C1_BAT.2 C2.2 C2_BAT.2 C3.- C4_USB.2 C5.2 C5_USB.2 C6.2 C7.2 C8.2 C9.2 C10.2 C10_SUPERCAP.1 C_DELAY.2 CHANGE_BUTTON.1 CHANGE_BUTTON.2 D1.2 D3.1 D6.1 D8.1 D9.1 D10.1 D11.1 D12.1 EPD_C1.1 EPD_C2.1 EPD_C5.1 EPD_C6.1 EPD_C7.1 EPD_C8.1 EPD_C9.1 EPD_C10.1 EPD_C11.1 EPD_C12.1 IC1.3 IC4.2 J1.8 J1.17 J1.MP1 J1.MP2 J2.A1 J2.A12 J2.B1 J2.B12 J2.MP1 J2.MP2 J2.MP3 J2.MP4 J3.1 J4.G1 J4.G2 J4.G3 J4.G4 J4.P6 MCP73831.2 R1_PWRUSB.1 R2-USB1.1 R2-USB.2 R2.1 R2_BAT.1 R4.1 RESET_BUTTON.1 RESET_BUTTON.2 SENSOR2.1 SENSOR2.5 SENSOR2.7 SJ1.1 TP4.TP TP5.TP U2.1 U2.28 U2.29_1 U2.29_2 U2.29_3 U2.29_4 U2.29_5 U2.29_6 U2.29_7 U2.29_8 U2.29_9 U3.13 U4.1 U4.4 U4.6 U4.9 U6.4 U6.9
GPIO8: R1.1 U2.10
I2C_PW: C1.1 C2.1 R1_PINH.2 R2_PINH.2 SENSOR2.2 SENSOR2.6 SENSOR2.8 U2.17
INT_RTC: R1_PINH1.1 TP15.TP U2.8 U3.3
IO/BOOT: U2.15
IO/CHANGE: U2.23
MISO: D12.2 J4.P7 R8.1 TP6.TP U2.27 U6.2
MOSI: D11.2 J1.14 J4.P3 R7.1 TP7.TP U2.7 U6.5
N$1: J2.A5 R2-USB1.2
N$2: J2.B5 R2-USB.1
N$3: C_DELAY.1 IC1.5
N$4: C1_BAT1.1 D2.1 IC4.1 IC4.3 Q1.2
N$5: MCP73831.5 R2_BAT.2
N$6: D7.1 R_CAPACITOR.1
N$7: C4.1 D3.2 D4.1
N$8: EPD_C12.2 J1.24
N$9: MCP73831.1 R1_BAT.2
N$10: CHG_LED.C R1_BAT.1
N$11: C8.1 C10_SUPERCAP.2 R_CAPACITOR.2
N$12: EPD_C10.2 J1.22
N$14: EPD_C8.2 J1.20
N$15: EPD_C7.2 J1.19
N$16: EPD_C6.2 J1.18
N$18: EPD_C2.2 J1.5
N$19: EPD_C1.2 J1.4
PREVGH: D5.1 EPD_C9.2 J1.21
PREVGL: D4.2 EPD_C11.2 J1.23
RESE: J1.3 Q3.2 R3.2
RESE': R2.2 R3.1 SJ1.2
RESET: C5.1 IC1.1 R_RESET.1 RESET_BUTTON.3 RESET_BUTTON.4 U2.3
RTC_RST: U2.16 U3.4
RX: TP2.TP U2.24
SCK: D10.2 J1.13 J4.P5 R6.1 TP8.TP U2.6 U6.6
SCL: J3.4 R2_PINH.1 SENSOR2.4 U2.20 U3.16 U4.7
SDA: J3.3 R1_PINH.1 SENSOR2.3 U2.19 U3.15 U4.8
SRC: C4.2 D5.2 L1.1 Q3.3
SS_SD: D8.2 J4.P2 R10.1 U2.4
TX: TP1.TP U2.25
USB_D+: D1.1 U2.14
USB_D-: D1.3 U2.13
VBAT [power]: C2_BAT.1 MCP73831.3 Q1.3 TP3.TP U4.2 U4.3
VBUS [power]: C1_BAT.1 C4_USB.1 C5_USB.1 CHG_LED.A D1.5 D2.2 MCP73831.4 PFMF.050.1.2 Q1.1 R1_PWRUSB.2 TP14.TP
VRTC [power]: U3.14
VUSB [power]: J2.A4 J2.A9 J2.B4 J2.B9 PFMF.050.1.1

## Tracks (layer width: path | path; a pad name or v marks a point on that pad's centre or on a via)
3V3  (via drill 0.3)
  Top 0.3: R_BOOT.2 20.66,107.68 v19.83,107.68 17.82,107.68 9.86,99.72 9.37,99.72 R10.2 9.23,99.72 7.71,99.72 C9.1 7.57,99.58 7.5,99.51 7.5,92.1 5.84,90.44 4.94,90.44 J4.P4 | 49.81,104.43 49.81,101.8 48.57,100.55 47.94,100.55 IC1.2 | 49.81,104.43 52.44,107.06 52.44,107.48 52.51,107.55 R_RESET.2 52.65,107.55 53.21,107.55 53.34,107.41 60.55,107.41 R_CHANGE.2 60.68,107.34 61.17,107.34 61.86,106.64 69.96,106.64 71.9,108.58 72.67,108.58 TP16.TP | v49.67,104.5 49.81,104.43 | IC4.5 126.75,45.77 126.75,45.22 128.69,43.28 128.69,43.14 129.59,42.24 130.21,42.24 C3.+ 130.35,42.31 130.97,42.31 132.77,44.11 133.12,44.11 | 133.12,44.11 133.95,44.11 C1_BAT2.1 | v162.34,18.28 163.38,18.28 J3.2 | v133.12,43.97 133.12,44.11 | U2.2 8.96,48.68 9.02,48.61 9.02,47.85 13.32,43.56 19.34,43.56 R1.2 19.48,43.56 31.32,43.56 36.9,49.13 | U6.7 48.98,58.52 48.98,59.69 U6.8 48.84,59.69 47.67,59.69 46.97,60.39 | 37.97,50.14 38.25,49.86 38.8,49.86 R5.2 | 37.97,50.14 37.97,54.02 41.16,57.2 U6.3 41.16,57.34 41.64,57.82 41.78,57.82 42.06,58.1 42.06,59.28 43.16,60.39 46.97,60.39 | 36.9,49.13 37.83,50.07 37.97,50.14 | 90.57,63.05 89.7,63.92 89.01,63.92 88.87,64.06 D7.2 | 90.57,63.05 91.64,61.98 91.64,61.56 R1_PINH1.2 | 91.57,53.25 91.57,54.98 87.76,58.79 87.76,60.04 U3.2 87.83,60.18 87.83,60.59 88.66,61.42 88.94,61.42 90.57,63.05 | 91.57,53.25 91.57,52.49 R2_PINH1.2 | R9.2 71.9,25 v72.87,25 73.77,25 R_CL1.2 73.91,25 74.47,25 75.16,25.69 77.65,25.69 Q2.3 | 50.85,41.9 49.19,41.9 R8.2 49.05,41.83 44.83,41.83 R6.2 44.69,41.83 44.2,41.83 36.9,49.13 | 50.85,41.9 51.68,41.9 R7.2 | v50.85,41.76 50.85,41.9
  Top 0.3: v91.15,53.25 91.57,53.25 | v49.6,65.16 49.6,63.09 47.04,60.52 46.97,60.39
  Bottom 0.3: v19.83,107.68 46.49,107.68 v49.67,104.5 49.6,104.36 v49.6,65.16 | v162.34,18.28 158.81,18.28 v133.12,43.97 132.98,43.9 104.66,43.9 87.62,26.87 84.37,26.87 80.42,30.82 80.28,30.89 | v50.85,41.76 51.06,41.76 66.99,25.83 68.79,25.83 69.62,25 v72.87,25 73.01,25.07 74.47,25.07 80.28,30.89 | v91.15,53.25 91.15,48.54 91.22,48.48 91.22,46.81 79.31,34.9 79.24,34.9 78.9,34.56 78.9,32.69 80.28,31.3 80.28,30.89
32KHZ  (via drill 0.3)
  Top 0.15: 89.18,58.76 89.08,58.86 89.08,60.04 U3.1 | 89.18,58.76 92.4,55.54 92.4,51.94 91.64,51.18 R2_PINH1.1 | v32.98,64.61 17.89,49.51 17.89,48.75 U2.9 | 89.18,58.76 v89.08,58.66
  Bottom 0.15: v32.98,64.61 40.05,64.61 40.88,63.78 83.95,63.78 v89.08,58.66
BOOT
  Top 0.15: R_BOOT.1 20.73,108.93 21.21,108.93 21.84,109.55 22.25,109.55 BOOT_BUTTON.4 22.32,109.62 25.78,109.62 BOOT_BUTTON.3 25.85,109.55 26.41,109.55 26.96,109 27.44,109 C6.1
CHANGE
  Top 0.15: C10.1 67.33,108.72 67.33,109 66.92,109.42 65.95,109.42 65.81,109.55 CHANGE_BUTTON.3 65.74,109.62 62.35,109.62 CHANGE_BUTTON.4 62.28,109.55 61.72,109.55 60.89,108.72 60.62,108.72 R_CHANGE.1
DN  (via drill 0.3)
  Top 0.15: J2.A7 162.55,54.08 162.07,54.08 161.79,53.81 161.79,53.39 162.07,53.12 162.55,53.12 J2.B7 162.62,53.12 v163.59,53.12 | v153.76,53.05 153.69,52.98 152.86,52.98 D1.4
  Bottom 0.15: v153.76,53.05 163.52,53.05 v163.59,53.12
DP  (via drill 0.3)
  Top 0.15: 163.52,54.5 163.52,53.67 163.45,53.6 162.62,53.6 J2.A6 | 163.52,54.5 163.45,54.57 162.62,54.57 J2.B6 | v153.76,54.57 153.55,54.78 152.86,54.78 D1.6 | v163.59,54.57 163.52,54.57 163.52,54.5
  Bottom 0.15: v163.59,54.57 v153.76,54.57
EPD_3V3  (via drill 0.3)
  Top 0.3: J1.16 81.25,15.72 81.67,15.72 J1.15 81.74,15.86 81.74,16 81.6,16.14 81.6,16.27 81.74,16.41 81.74,16.48 83.4,18.14 85.96,18.14 88.66,20.84 88.66,21.19 EPD_C5.2 88.8,21.26 89.28,21.26 89.56,21.54 89.56,23.06 86.65,25.97 85.75,25.97 83.29,28.43 | Q2.2 75.64,24.72 78.97,24.72 C7.1 78.9,24.86 78.9,25.62 80.14,26.87 L1.2 80.21,27.01 81.88,27.01 83.29,28.43 | v77.72,107.55 76.75,108.52 TP17.TP | 83.29,28.43 v85.2,30.33
  Bottom 0.3: v77.72,107.55 77.72,73.54 91.71,59.55 91.71,36.84 v85.2,30.33
EPD_3V3_C  (via drill 0.3)
  Top 0.3: R_CL1.1 73.84,26.32 v74.67,26.32 74.74,26.32 74.95,26.52 75.5,26.52 75.57,26.59 Q2.1 | v20.38,65.09 20.38,66.2 U2.18 | v36.66,37.74 37.62,36.77 TP13.TP
  Bottom 0.3: v20.38,65.09 20.38,64.06 20.31,63.99 20.31,54.08 v36.66,37.74 36.79,37.81 41.29,42.31 51.13,42.31 67.12,26.32 v74.67,26.32
EPD_BUSY  (via drill 0.3)
  Top 0.15: v82.84,13.16 84.71,15.03 84.71,15.65 J1.9 | 43.48,29.6 38.11,24.24 TP9.TP | 43.48,29.6 v44.13,30.26 | v19.41,58.24 21.35,60.18 21.35,62.81 21,63.16 12.56,63.16 10.27,65.44 10.27,66.2 U2.26 | v43.44,29.64 43.48,29.6
  Bottom 0.15: v82.84,13.16 61.86,13.16 44.76,30.26 v44.13,30.26 | v19.41,58.24 19.41,53.67 v43.44,29.64
EPD_CS  (via drill 0.3)
  Top 0.15: v83.61,17.59 83.19,17.17 83.19,15.72 J1.12 | v76.34,22.64 75.64,22.64 75.5,22.78 D6.2 | v76.89,26.66 76.2,27.35 73.57,27.35 72.53,26.32 71.9,26.32 R9.1 | v20.38,47.58 20.38,48.68 U2.11 | v36.66,31.09 37.62,30.12 TP10.TP 37.69,30.05 38.94,30.05 v41.64,32.76 | v71.56,22.64 71.49,22.71 v70.31,22.71
  Bottom 0.15: v83.61,17.59 81.39,17.59 v76.34,22.64 | v76.89,26.66 76.89,23.27 76.34,22.71 v76.34,22.64 | v20.38,47.58 20.38,47.37 v36.66,31.09 | v71.56,22.64 v76.34,22.64 | v70.31,22.71 52.72,22.71 42.68,32.76 v41.64,32.76
EPD_DC  (via drill 0.3)
  Top 0.15: v83.75,16.48 83.75,15.72 J1.11 | v48.15,26.25 39.91,18 38.73,18 TP11.TP 38.66,18 v37.69,18.97 | v12.76,47.09 12.76,48.68 U2.5
  Bottom 0.15: v83.75,16.48 87.07,16.48 87.9,15.65 88.52,15.65 89.01,15.17 89.01,14.61 87.07,12.67 61.72,12.67 v48.15,26.25 | v12.76,47.09 12.76,43.9 v37.69,18.97
EPD_RST  (via drill 0.3)
  Top 0.15: v89.56,11.91 90.25,12.6 90.25,15.23 88.52,16.97 84.85,16.97 84.23,16.34 84.23,15.72 J1.10 | v39.7,11.91 38.73,10.94 TP12.TP | v16.57,65.09 16.57,66.2 U2.21 | v17.2,56.02 v16.57,56.65
  Bottom 0.15: v89.56,11.91 v39.7,11.91 39.7,17.59 17.2,40.1 v17.2,56.02 | v16.57,56.65 v16.57,65.09
FLASH_CS  (via drill 0.3)
  Top 0.15: 39.6,50.86 39.84,50.62 39.84,50.28 40.33,49.79 40.6,49.79 D9.2 | 39.6,50.86 39.36,51.11 38.87,51.11 R5.1 | v40.88,59.14 41.16,59.42 41.16,59.69 U6.1 | 39.6,50.86 v39.7,50.97 | v23.71,51.52 21.7,49.51 21.7,48.75 U2.12
  Bottom 0.15: v40.88,59.14 39.7,57.96 39.7,51.52 | v39.7,50.97 39.7,51.52 | 39.7,51.52 v23.71,51.52
GDR  (via drill 0.3)
  Top 0.15: v88.25,14.89 88.25,15.65 J1.2 | v69.2,16.07 68.79,16.48 68.58,16.48 Q3.1 68.51,16.41 68.51,15.72 68.37,15.58 68.3,15.58 67.33,14.61 67.33,14.13 R4.2
  Bottom 0.15: v88.25,14.89 87.97,14.89 87.69,14.61 87.07,14.61 86.86,14.4 77.72,14.4 75.85,16.27 72.73,16.27 72.53,16.07 v69.2,16.07
GND  (via drill 0.3)
  Top 0.15: U2.29_7 14.63,54.78 14.63,55.95 U2.29_8 | U2.29_7 14.56,54.78 13.46,54.78 U2.29_4 13.39,54.78 13.39,55.95 U2.29_5 13.39,56.02 13.39,57.2 U2.29_6 | U2.29_3 12.14,57.27 13.39,57.27 U2.29_6 | U2.29_9 14.63,57.27 13.46,57.27 U2.29_6 | U2.29_3 12.14,57.2 12.14,56.02 U2.29_2 12.14,55.95 12.14,54.78 U2.29_1 12.14,54.71 12.14,54.36 7.64,49.86 7.64,48.75 U2.1 | U2.29_3 12.14,57.34 12.14,57.62 7.64,62.12 7.64,66.2 U2.28 7.64,66.27 7.64,75.76 6.7,76.69 | C9.2 7.64,100.97 7.16,100.97 2.31,96.12 2.31,95.5 J4.G4 2.38,95.5 3,94.87 3,93.69 3.87,92.83 | 3.87,92.83 4.04,92.66 4.87,92.66 J4.P6 | 3.87,92.83 1.27,90.23 1.27,82.34 J4.G3 1.27,82.27 1.27,82.13 6.7,76.69 | CHANGE_BUTTON.1 62.35,108.1 v63.39,108.1 65.74,108.1 CHANGE_BUTTON.2 65.81,108.03 66.36,108.03 66.99,107.41 67.33,107.41 C10.2 67.33,107.48 67.96,107.48 70.45,109.97 79.59,109.97 81.04,108.52 81.67,108.52 TP5.TP | C_DELAY.2 52.31,100.27 50.09,100.27 49.4,99.58 47.94,99.58 IC1.3 47.8,99.58 47.32,99.58 47.04,99.86 47.04,107.96 RESET_BUTTON.1 | RESET_BUTTON.1 47.25,108.03 46.7,108.03 46.35,107.68 45.59,107.68 C5.2 45.52,107.68 27.51,107.68 C6.2 27.44,107.68 26.75,107.68 26.41,108.03 25.85,108.03 BOOT_BUTTON.2 25.71,108.1 22.32,108.1 BOOT_BUTTON.1 22.25,108.03 22.25,107.82 14.29,99.86 12.42,99.86 12,99.44 12,99.03 D8.1 12,98.96 12,95.22 15.46,91.76 15.46,91.06 J4.G2 15.53,91 15.53,90.3 16.43,89.4 16.43,87.12 15.53,86.22 15.53,85.32 J4.G1 15.46,85.25 15.26,85.25 6.7,76.69 | RESET_BUTTON.2 50.78,108.1 v49.67,108.1 47.32,108.1 RESET_BUTTON.1 | D10.1 44.83,36.49 49.05,36.49 D12.1 49.12,36.56 51.68,36.56 D11.1
  Top 0.15: U6.9 45.03,57.89 43.1,55.95 41.23,55.95 U6.4 41.29,55.88 40.67,55.26 40.67,54.5 | 40.67,54.5 40.67,51.24 D9.1 40.74,51.24 41.02,50.97 43.86,50.97 52.51,42.31 52.51,36.98 52.1,36.56 51.75,36.56 D11.1 | C8.2 88.38,47.51 88.38,48.06 87.07,49.38 86.1,49.38 85.27,50.21 85.27,50.76 U3.13 | C8.2 88.32,47.51 88.32,46.88 81.94,40.51 81.94,34.62 D3.1 81.88,34.83 80.56,34.83 78.14,32.41 76.75,32.41 71.25,26.9 | C8.2 88.45,47.78 89.56,47.78 92.4,50.62 92.4,51.52 92.89,52.01 92.96,52.01 93.65,52.7 93.65,53.12 C10_SUPERCAP.1 93.72,52.91 110.48,52.91 118.51,44.87 118.99,44.87 119.06,44.8 R1_PWRUSB.1 119.13,44.74 119.13,44.39 120.9,42.62 | EPD_C2.1 72.39,20.22 73.77,20.22 EPD_C1.1 | 73.98,22.02 73.98,20.5 73.77,20.29 EPD_C1.1 | 73.98,22.02 73.98,22.78 D6.1 73.91,22.85 73.63,23.13 72.46,23.13 71.07,24.52 71.07,26.73 71.25,26.9 | EPD_C5.1 88.66,22.58 87.07,22.58 EPD_C6.1 87,22.58 85.48,22.58 EPD_C7.1 85.41,22.58 83.75,22.58 EPD_C8.1 83.68,22.58 82.15,22.58 EPD_C9.1 82.01,22.58 80.56,22.58 EPD_C10.1 | EPD_C10.1 80.49,22.64 79.04,22.64 EPD_C11.1 78.97,22.64 77.44,22.64 EPD_C12.1 77.37,22.58 77.3,22.51 76.82,22.51 76.34,22.02 73.98,22.02 | C7.2 80.35,24.65 80.35,22.71 EPD_C10.1 | 66.02,13.43 66.02,14.06 R4.1 | 66.02,13.43 65.19,12.6 65.19,12.05 SJ1.1 | 66.02,13.43 66.02,13.37 66.09,13.3 67.26,13.3 67.68,12.88 68.72,12.88 R2.1 68.79,12.88 75.71,12.88 75.85,13.02 76.06,13.02 76.2,13.16 J1.MP2 | 80.52,14.85 80.7,15.03 80.7,15.65 J1.17 | 80.52,14.85 78.9,13.23 76.27,13.23 J1.MP2 | 85.3,14.99 85.2,15.1 85.2,15.65 J1.8 | 85.3,14.99 87.07,13.23 89.7,13.23 J1.MP1
  Top 0.15: 80.52,14.85 82.71,12.67 82.98,12.67 85.3,14.99 | EPD_C1.1 74.05,20.5 76.2,18.35 76.2,13.23 J1.MP2 | 71.25,26.9 70.8,27.35 53.76,27.35 51.34,29.78 51.34,30.68 51.41,30.75 51.41,36.49 D11.1 | 149.32,53.67 149.39,53.67 149.53,53.81 150.23,53.81 D1.2 | 149.32,53.67 147.66,53.67 R2-USB1.1 147.59,53.67 135.82,53.67 | U4.9 137.21,58.17 136.58,57.55 136.51,57.55 136.44,57.48 136.17,57.48 U4.4 136.1,57.41 135.61,57.41 135.54,57.34 135.34,57.34 | U4.1 136.17,58.93 136.44,58.93 136.51,58.86 136.58,58.86 137.21,58.24 U4.9 | U4.6 138.11,57.96 137.48,57.96 137.28,58.17 U4.9 | 135.34,57.34 133.74,57.34 C2_BAT.2 | 135.82,53.67 135.82,56.78 135.34,57.27 135.34,57.34 | 135.82,53.67 135.82,51.04 135.61,50.83 134.57,50.83 134.3,51.11 134.3,53.53 131.8,56.02 131.11,56.02 MCP73831.2 | J2.B12 162.41,50.48 162.41,50.14 J2.A1 162.41,50.07 162.41,49.51 163.17,48.75 J2.MP3 | J2.MP3 163.24,48.75 167.05,48.75 J2.MP1 166.29,48.82 166.29,58.93 J2.MP2 167.05,59 163.24,59 J2.MP4 163.17,58.93 162.41,58.17 162.41,57.62 J2.A12 162.41,57.55 162.41,57.2 J2.B1 162.34,57.27 161.65,57.27 160.61,56.23 155.21,56.23 | C5_USB.2 153.34,49.79 153.34,50.83 C4_USB.2 153.41,50.83 153.41,51.52 153.51,51.63 | 155.21,56.23 154.94,56.51 154.45,56.51 R2-USB.2 | 155.21,56.23 155.21,53.32 153.51,51.63 | C1.2 155.9,5.89 156.87,5.89 C2.2 156.6,5.96 156.6,9.14 157.01,9.56 157.01,10.18 SENSOR2.5 156.94,10.25 156.94,10.94 | 155.35,11.08 155.35,11.63 154.52,12.46 154.52,13.09 SENSOR2.1 | 155.35,11.08 155.35,10.25 SENSOR2.7 | 156.94,10.94 156.8,11.08 155.35,11.08 | 156.94,10.94 156.94,11.01 157.01,11.08 157.22,11.08 163.38,17.24 J3.1 163.45,17.31 164.21,17.31 164.49,17.59 164.49,20.71 149.64,35.56
  Top 0.15: 120.9,42.62 121.21,42.31 121.21,41.97 C1_BAT1.2 | 120.9,42.62 123.15,44.87 123.91,44.87 IC4.2 123.98,44.87 124.53,44.87 127.72,48.06 127.79,48.06 | 127.79,48.06 127.79,47.99 130.21,45.57 130.21,45.22 C3.- 130.28,45.43 133.95,45.43 C1_BAT2.2 134.02,45.36 134.16,45.22 134.71,45.22 140.39,39.54 142.68,39.54 TP4.TP 142.75,39.54 145.65,39.54 149.64,35.56 | 127.79,48.06 127.79,51.94 R2_BAT.1 127.72,52.01 127.65,52.08 127.16,52.08 123.43,55.82 118.37,55.82 C1_BAT.2 | 149.64,35.56 162.97,48.89 J2.MP3 | 153.51,51.63 v153.41,51.73 | v149.32,53.6 149.32,53.67 | v20.87,54.78 14.7,54.78 U2.29_7 | 40.67,54.5 v39.22,54.5
  Bottom 0.15: v49.67,108.1 v63.39,108.1 | v149.32,53.6 151.54,53.6 v153.41,51.73 | v20.87,54.78 21.84,54.78 22.11,54.5 v39.22,54.5
GPIO8  (via drill 0.3)
  Top 0.15: v18.51,42.59 18.79,42.31 19.34,42.31 R1.1 | v18.65,47.58 19.07,47.99 19.07,48.68 U2.10
  Bottom 0.15: v18.51,42.59 18.51,47.44 v18.65,47.58
I2C_PW  (via drill 0.3)
  Top 0.15: C2.1 156.87,4.57 155.9,4.57 C1.1 155.83,4.64 155.35,5.12 155.21,5.12 154.8,5.54 154.8,5.82 R2_PINH.2 | R1_PINH.2 153.76,5.89 154.73,5.89 R2_PINH.2 | 154.73,9.35 154.59,9.49 154.59,10.18 SENSOR2.8 154.59,10.25 154.59,10.87 153.9,11.56 153.9,12.4 | 154.73,9.35 155.97,9.35 156.18,9.56 156.18,10.18 SENSOR2.6 | 153.9,12.4 153.9,13.71 154.17,13.99 155.14,13.99 155.28,13.85 155.28,13.16 SENSOR2.2 | v21.21,65.09 21.63,65.51 21.63,66.2 U2.17 | v153.83,12.4 153.9,12.4 | R2_PINH.2 154.52,5.96 154.52,9.07 154.73,9.28 154.73,9.35
  Bottom 0.15: v21.21,65.09 21,65.09 20.52,65.58 20.24,65.58 19.9,65.23 19.9,53.88 61.38,12.4 v153.83,12.4
INT_RTC  (via drill 0.3)
  Top 0.15: R1_PINH1.1 91.71,60.25 92.19,60.25 92.47,60.52 92.47,62.05 89.56,64.96 86.24,64.96 85.96,64.68 85.96,61.77 86.45,61.29 86.45,60.11 U3.3 86.45,60.04 86.45,59.49 v82.98,56.02 | v22.94,55.47 21.49,54.02 21.14,54.02 16.57,49.44 16.57,48.75 U2.8 | v54.73,58.66 TP15.TP
  Bottom 0.15: v22.94,55.47 36.17,55.47 40.6,59.9 53.48,59.9 v54.73,58.66 54.8,58.66 57.43,56.02 v82.98,56.02
MISO  (via drill 0.3)
  Top 0.15: v6.25,93.35 5.91,93.69 5.15,93.69 J4.P7 | v8.96,67.38 8.96,66.27 U2.27 8.96,66.2 8.96,65.51 11.79,62.67 v20.87,62.67 | 49.12,38.92 49.12,38.09 D12.2 | 49.12,38.92 49.12,40.58 R8.1 49.05,40.65 48.98,40.72 48.5,40.72 48.01,41.2 45.45,41.2 45.38,41.13 44.2,41.13 44.13,41.2 44.06,41.2 v41.78,43.49 | U6.2 41.16,58.45 41.16,58.24 40.67,57.76 v40.53,57.76 40.46,57.76 v39.15,59.07 | v49.05,31.65 49.67,31.02 49.67,30.4 TP6.TP | v49.05,38.92 49.12,38.92
  Bottom 0.15: v6.25,93.35 6.25,93.14 8.96,90.44 v8.96,67.38 | v40.53,57.76 40.53,44.74 v41.78,43.49 | v49.05,38.92 v49.05,31.65 | v20.87,62.67 35.55,62.67 v39.15,59.07
MOSI  (via drill 0.3)
  Top 0.15: 51.68,39.06 D11.2 | 51.68,39.06 51.68,40.51 R7.1 | v82.08,14.89 82.22,15.03 82.22,15.65 J1.14 | v53.69,29.36 52.72,30.33 TP7.TP 52.65,30.33 52.65,31.3 52.79,31.44 52.79,39.2 | 52.79,39.2 52.79,42.45 48.98,46.26 48.98,55.88 U6.5 48.91,55.95 48.29,55.95 v48.08,56.16 | 16.81,50.93 20.17,54.29 21.14,54.29 v22.04,55.19 | 16.81,50.93 15.33,49.44 15.33,48.75 U2.7 | v7.22,88.09 6.05,89.26 5.15,89.26 J4.P3 | 16.81,50.93 v13.8,53.95 | v53,39.06 52.86,39.2 52.79,39.2 | v51.75,39.06 51.68,39.06
  Bottom 0.15: v82.08,14.89 77.65,14.89 75.99,16.55 72.6,16.55 72.39,16.34 71.83,16.34 70.8,17.38 70.8,22.85 68.51,25.14 57.91,25.14 v53.69,29.36 | v22.04,55.19 22.6,55.19 22.81,54.98 36.1,54.98 40.74,59.62 44.62,59.62 v48.08,56.16 | v7.22,88.09 7.22,87.81 8.47,86.56 8.47,59.28 v13.8,53.95 | v53,39.06 v51.75,39.06
N$1  (via drill 0.3)
  Top 0.15: v148.49,54.78 148.36,54.91 147.66,54.91 R2-USB1.2 | v163.59,52.49 163.52,52.56 162.62,52.56 J2.A5
  Bottom 0.15: v148.49,54.78 148.84,54.78 149.74,53.88 152.3,53.88 153.69,52.49 v163.59,52.49
N$2  (via drill 0.3)
  Top 0.15: v153.62,55.4 153.76,55.26 154.38,55.26 R2-USB.1 | v163.59,55.4 163.38,55.61 162.62,55.61 J2.B5
  Bottom 0.15: v163.59,55.4 v153.62,55.4
N$3
  Top 0.15: IC1.5 50.71,101.52 52.31,101.52 C_DELAY.1
N$4  (via drill 0.3)
  Top 0.15: C1_BAT1.1 122.46,41.97 122.46,42.45 123.22,43.21 123.49,43.21 123.91,43.63 123.91,43.84 IC4.3 123.98,43.9 124.46,43.9 124.81,44.25 v124.81,44.46 | D2.1 120.86,44.32 121.9,44.32 123.36,45.77 123.91,45.77 IC4.1 123.98,45.84 124.53,45.84 v124.81,46.12 | v135.61,48.68 135.96,49.03 135.96,49.51 Q1.2
  Bottom 0.15: v135.61,48.68 127.37,48.68 v124.81,46.12 v124.81,44.46
N$5
  Top 0.15: R2_BAT.2 127.79,53.25 127.79,54.36 128.48,55.05 MCP73831.5
N$6
  Top 0.15: D7.1 86.72,64.06 86.72,63.23 87,62.95 87,62.39 87.07,62.33 R_CAPACITOR.1
N$7  (via drill 0.3)
  Top 0.15: 87.52,27.32 87,26.8 86.52,26.8 D4.1 | 87.52,27.32 87.76,27.56 91.29,27.56 93.51,29.78 93.51,31.23 93.23,31.51 92.68,31.51 C4.1 | v79.45,34.35 79.24,34.56 78.48,34.56 D3.2 | 87.52,27.32 v87.42,27.42
  Bottom 0.15: v79.45,34.35 80.49,34.35 v87.42,27.42
N$8
  Top 0.15: J1.24 77.24,15.72 77.24,21.12 77.37,21.26 EPD_C12.2
N$9  (via drill 0.3)
  Top 0.15: v127.16,55.4 126.47,55.4 R1_BAT.2 | v130.07,55.33 130.28,55.12 131.04,55.12 MCP73831.1
  Bottom 0.15: v127.16,55.4 130,55.4 v130.07,55.33
N$10
  Top 0.15: CHG_LED.C 124.95,56.85 124.95,55.61 125.09,55.47 R1_BAT.1
N$11  (via drill 0.3)
  Top 0.15: R_CAPACITOR.2 88.38,62.26 88.32,62.19 88.32,61.7 88.11,61.49 87.42,61.49 87.14,61.22 87.14,58.93 84.58,56.37 84.58,49.65 86.72,47.51 87.07,47.51 C8.1 87.07,47.58 87.07,47.92 v87.48,48.34 | v90.67,48.27 90.67,48.34 93.23,50.9 93.65,50.9 C10_SUPERCAP.2
  Bottom 0.15: v90.67,48.27 87.55,48.27 v87.48,48.34
N$12
  Top 0.15: J1.22 78.2,15.72 78.2,18.7 80.49,20.98 80.49,21.26 EPD_C10.2
N$13
  pour Top: 92.34,10.08 92.35,10.05 92.35,0.15 169.04,0.15 169.04,67.05 92.2,67.05 92.19,67.05 92.16,67.05 92.13,67.06 92.06,67.13 92.05,67.16 92.05,111.04 70.16,111.04 70.16,110.35 70.14,110.33 70.07,110.26 70.05,110.24 19.95,110.24 19.93,110.26 19.86,110.33 19.84,110.35 19.84,111.04 0.16,111.04 0.16,66.65 6.3,66.65 6.33,66.64 6.4,66.57 6.41,66.54 6.41,48.46 6.4,48.43 6.32,48.35 6.29,48.34 0.15,48.34 0.15,0.16 73.84,0.16 73.84,10.05 73.85,10.07 73.93,10.15 73.95,10.16 92.25,10.16 92.27,10.15
N$14
  Top 0.15: J1.20 79.24,15.72 79.24,16.48 83.75,20.98 83.75,21.26 EPD_C8.2
N$15
  Top 0.15: J1.19 79.73,15.72 79.73,16.34 83.95,20.57 84.37,20.57 84.58,20.77 84.58,20.91 84.78,21.12 85.34,21.12 85.41,21.19 EPD_C7.2
N$16
  Top 0.15: J1.18 80.21,15.72 80.21,16.34 84.16,20.29 85.75,20.29 86.65,21.19 87,21.19 EPD_C6.2
N$18  (via drill 0.3)
  Top 0.15: v86.72,14.89 86.72,15.65 J1.5 | v75.09,15.79 74.05,16.83 74.05,16.9 72.32,18.63 72.32,18.91 EPD_C2.2
  Bottom 0.15: v86.72,14.89 87.55,14.89 88.04,15.37 88.38,15.37 88.73,15.03 88.73,14.75 87.62,13.64 77.24,13.64 v75.09,15.79
N$19  (via drill 0.3)
  Top 0.15: v87.21,14.13 87.21,15.65 J1.4 | v75.71,15.79 75.71,16.69 73.77,18.63 73.77,18.91 EPD_C1.2
  Bottom 0.15: v87.21,14.13 77.37,14.13 v75.71,15.79
PREVGH  (via drill 0.3)
  Top 0.15: 81.7,20.6 82.08,20.98 EPD_C9.2 | 81.7,20.6 78.76,17.66 78.76,15.72 J1.21 | v93.58,31.99 93.3,32.27 92.06,32.27 90.81,31.02 89.98,31.02 D5.1 | 81.7,20.6 v81.81,20.5
  Bottom 0.15: v93.58,31.99 93.58,30.82 83.26,20.5 v81.81,20.5
PREVGL  (via drill 0.3)
  Top 0.15: J1.23 77.72,15.72 77.72,19.74 78.97,20.98 78.97,21.26 EPD_C11.2 79.04,21.33 79.24,21.33 v79.8,21.88 | v89.01,26.87 89.91,26.87 D4.2
  Bottom 0.15: v89.01,26.87 88.18,26.87 83.19,21.88 v79.8,21.88
RESE  (via drill 0.3)
  Top 0.15: v87.69,16.48 87.69,15.72 J1.3 | v72.11,17.11 72.11,16.41 72.04,16.34 R3.2 72.04,16.48 69.89,16.48 Q3.2
  Bottom 0.15: v87.69,16.48 87.48,16.48 86.86,17.11 v72.11,17.11
RESE'
  Top 0.15: R2.2 68.72,11.56 67.12,11.56 SJ1.2 66.99,11.63 66.16,10.8 64.49,10.8 64.22,11.08 64.22,13.57 68.23,17.59 72.53,17.59 73.29,16.83 73.29,16.34 R3.1
RESET  (via drill 0.3)
  Top 0.15: C5.1 45.59,109 46.14,109 46.7,109.55 47.25,109.55 RESET_BUTTON.4 47.32,109.62 50.78,109.62 RESET_BUTTON.3 50.85,109.55 51.41,109.55 52.31,108.65 | 47.87,102.14 47.87,103.46 51.82,107.41 51.82,107.82 51.75,107.89 51.75,108.1 52.31,108.65 | 47.87,102.14 47.87,101.52 IC1.1 | 52.31,108.65 52.51,108.86 R_RESET.1 52.31,108.65 | v10.41,49.86 10.27,49.72 10.27,48.75 U2.3 | v47.8,102.14 47.87,102.14
  Bottom 0.15: v10.41,49.86 19.62,59.07 19.62,73.96 v47.8,102.14
RTC_RST  (via drill 0.3)
  Top 0.15: v23.36,65.09 22.94,65.51 22.94,66.2 U2.16 | v84.58,61.29 84.58,61.01 85.2,60.39 85.2,60.11 U3.4
  Bottom 0.15: v23.36,65.09 31.88,65.09 33.47,63.5 82.36,63.5 v84.58,61.29
RX
  Top 0.15: U2.24 12.76,66.27 12.76,71.26 14.77,73.27 14.77,74.44 TP2.TP
SCK  (via drill 0.3)
  Top 0.15: v82.57,16.48 82.71,16.34 82.71,15.72 J1.13 | v46.97,29.78 46.77,29.78 46.35,30.19 45.73,30.19 TP8.TP 45.66,30.26 45.66,30.89 43.93,32.62 43.93,37.53 44.41,38.02 44.69,38.02 D10.2 44.76,38.02 44.76,40.51 R6.1 44.69,40.44 44.41,40.44 41.99,42.87 v41.78,42.87 | v48.98,56.58 48.98,57.13 U6.6 | 14.39,47.68 14.98,47.09 v28.07,47.09 | 14.39,47.68 14.08,47.99 14.08,48.68 U2.6 | v3.97,91.2 4.25,91.48 5.08,91.48 J4.P5 | 14.39,47.68 v14.29,47.58
  Bottom 0.15: v82.57,16.48 76.47,16.48 76.13,16.83 72.46,16.83 72.25,16.62 71.97,16.62 71.07,17.52 71.07,22.99 68.65,25.41 58.26,25.41 53.83,29.85 47.04,29.85 v46.97,29.78 | v48.98,56.58 48.98,50.07 v41.78,42.87 41.71,42.87 37.49,47.09 v28.07,47.09 | v3.97,91.2 3.97,69.32 6.95,66.34 6.95,52.7 12.07,47.58 v14.29,47.58
SCL  (via drill 0.3)
  Top 0.15: v139.01,57.76 139.01,58.24 138.8,58.45 138.18,58.45 U4.7 | v162.76,20.98 163.38,20.36 J3.4 | v154.8,3.81 154.8,4.5 R2_PINH.1 | v157.57,12.95 157.43,13.09 156.94,13.09 SENSOR2.4 | v20.1,67.38 18.3,67.38 17.89,66.97 17.89,66.27 U2.20 | v88.38,51.94 89.01,51.31 89.01,50.83 U3.16 | v92.26,57.62 92.06,57.41 v91.15,57.41
  Bottom 0.15: v154.8,3.81 154.8,10.11 157.6,12.91 | 157.6,12.91 162.83,18.14 162.83,20.98 v162.76,20.98 162.76,34.14 139.14,57.76 v139.01,57.76 92.4,57.76 v92.26,57.62 | v157.57,12.95 157.6,12.91 | v20.1,67.38 20.45,67.38 24.61,63.23 77.1,63.23 87.03,53.29 | v88.38,51.94 87.03,53.29 | 87.03,53.29 v91.15,57.41
SDA  (via drill 0.3)
  Top 0.15: 156.08,13.88 156.18,13.78 156.18,13.16 SENSOR2.3 | 156.08,13.88 155.7,14.27 154.03,14.27 152.93,13.16 152.93,4.92 153.27,4.57 153.69,4.57 R1_PINH.1 | v139.49,56.78 139.49,58.24 138.73,59 138.18,59 U4.8 | J3.3 163.38,19.32 162.62,19.32 v162.34,19.6 161.79,19.6 156.08,13.88 | v20.87,63.78 19.13,65.51 19.13,66.2 U2.19 | v87.48,52.22 87.76,51.94 87.76,50.83 U3.15 | v90.67,47.64 v92.26,49.24
  Bottom 0.15: 139.49,49.24 139.49,42.45 v162.34,19.6 | 139.49,49.24 v139.49,56.78 | v20.87,63.78 23.64,63.78 24.47,62.95 76.75,62.95 v87.48,52.22 87.48,52.15 87,51.66 87,48.2 87.55,47.64 v90.67,47.64 | v92.26,49.24 139.49,49.24
SRC  (via drill 0.3)
  Top 0.15: C4.2 92.61,30.26 87.76,30.26 87,31.02 86.52,31.02 D5.2 86.45,31.02 80.91,31.02 80.42,31.51 80.21,31.51 L1.1 77.28,31.58 v77.05,31.34 | v70.59,26.87 69.2,25.48 69.2,18.56 Q3.3
  Bottom 0.15: v70.59,26.87 72.58,26.87 v77.05,31.34
SS_SD  (via drill 0.3)
  Top 0.15: v10.06,101.04 9.3,101.04 R10.1 | v12.97,98.2 13.39,98.61 13.39,98.96 D8.2 | v6.6,88.09 6.53,88.16 5.49,88.16 J4.P2 | v10.41,50.48 11.45,49.44 11.45,48.75 U2.4
  Bottom 0.15: 11.69,99.41 12.9,98.2 v12.97,98.2 | 11.69,99.41 v10.06,101.04 | 11.69,99.41 5.77,93.49 5.77,93.21 6.6,92.38 v6.6,88.09 6.6,88.02 7.22,87.39 7.22,60.11 10.41,56.92 v10.41,50.48
TX
  Top 0.15: U2.25 11.45,66.27 11.45,73.34 11.38,73.41 11.38,74.44 TP1.TP
USB_D+  (via drill 0.3)
  Top 0.15: v149.32,54.91 149.39,54.85 150.23,54.85 D1.1 | v91.15,59.35 v92.26,58.24 | v40.39,64.89 24.19,48.68 U2.14
  Bottom 0.15: v149.32,54.91 149.12,54.91 145.79,58.24 v92.26,58.24 | v91.15,59.35 88.8,59.35 83.47,64.68 40.6,64.68 v40.39,64.89
USB_D-  (via drill 0.3)
  Top 0.15: v139.01,52.91 150.23,52.91 D1.3 | v90.67,47.02 v93.37,49.72 | v24.33,50.83 22.94,49.44 22.94,48.75 U2.13
  Bottom 0.15: v139.01,52.91 96.56,52.91 v93.37,49.72 | v90.67,47.02 59.16,47.02 49.12,57.06 48.84,57.06 48.5,56.72 48.5,56.37 48.57,56.3 48.57,56.02 48.22,55.68 43.23,55.68 40.67,58.24 40.39,58.24 40.05,57.89 40.05,51.24 40.19,51.11 40.19,50.83 39.84,50.48 24.67,50.48 v24.33,50.83
VBAT
  Top 0.3: U4.3 136.17,57.96 136.17,58.45 U4.2 136.03,58.45 135.34,58.45 | 131.91,56.96 131.87,56.99 131.11,56.99 MCP73831.3 | 131.91,56.96 135.06,53.81 Q1.3 | 131.91,56.96 132.08,57.13 132.08,57.62 133.05,58.59 133.67,58.59 C2_BAT.1 133.81,58.59 134.3,58.59 134.44,58.45 135.34,58.45 | 135.34,58.45 135.34,59.21 135.68,59.55 142.88,59.55 148.91,65.58 149.67,65.58 TP3.TP
VBUS
  Top 0.3: 151.96,53.81 152.79,53.81 D1.5 | 151.96,53.81 151.75,53.6 151.75,51.8 | 151.75,51.8 151.75,51.73 151.96,51.52 151.96,51.04 C4_USB.1 152.03,50.83 152.03,49.79 C5_USB.1 152.03,49.65 152.03,49.17 153.41,47.78 153.41,47.23 PFMF.050.1.2 | TP14.TP 149.88,61.84 149.88,61.01 151.75,59.14 151.75,53.95 151.82,53.88 151.96,53.81 | R1_PWRUSB.2 119.13,46.05 119.89,46.05 120.17,46.33 120.72,46.33 120.79,46.4 D2.2 120.59,46.47 120.59,47.09 117.05,50.62 117.05,55.75 C1_BAT.1 117.12,55.88 117.12,56.51 118.3,57.69 125.99,57.69 126.26,57.41 126.26,57.06 126.33,56.99 CHG_LED.A 126.47,56.92 127.58,56.92 127.65,56.99 128.41,56.99 MCP73831.4 128.41,56.85 129.52,55.75 129.52,55.12 134.16,50.48 134.16,50.41 | 134.16,50.41 134.16,49.58 Q1.1 | 151.75,51.8 137.14,51.8 135.75,50.41 134.16,50.41
VUSB
  Top 0.3: J2.A4 162.41,51.11 162.41,51.45 J2.B9 162.27,51.38 161.58,51.38 161.38,51.59 | 162.41,56.37 162.41,56.58 J2.A9 | 162.41,56.37 162.41,56.23 J2.B4 | 161.38,51.59 161.38,56.09 161.65,56.37 162.41,56.37 | 161.38,51.59 161.24,51.52 160.96,51.52 154.38,44.94 151.33,44.94 149.12,47.16 148.98,47.16 PFMF.050.1.1